# Altium PCB ComboCamera.PcbDoc (part 2 of 2)
Units mm, origin at the board's own origin, x right, y up, seen from the top; angles counter-clockwise.
Board outline 54.59 x 25.9 mm, 6 copper layers (L1, L2, Layer 1, Layer 2, L5, L6), stack 1.597 mm thick; 83 components, 54 nets, 269 pads, 161 vias.
Unrouted connection lines stored in the file: 227.
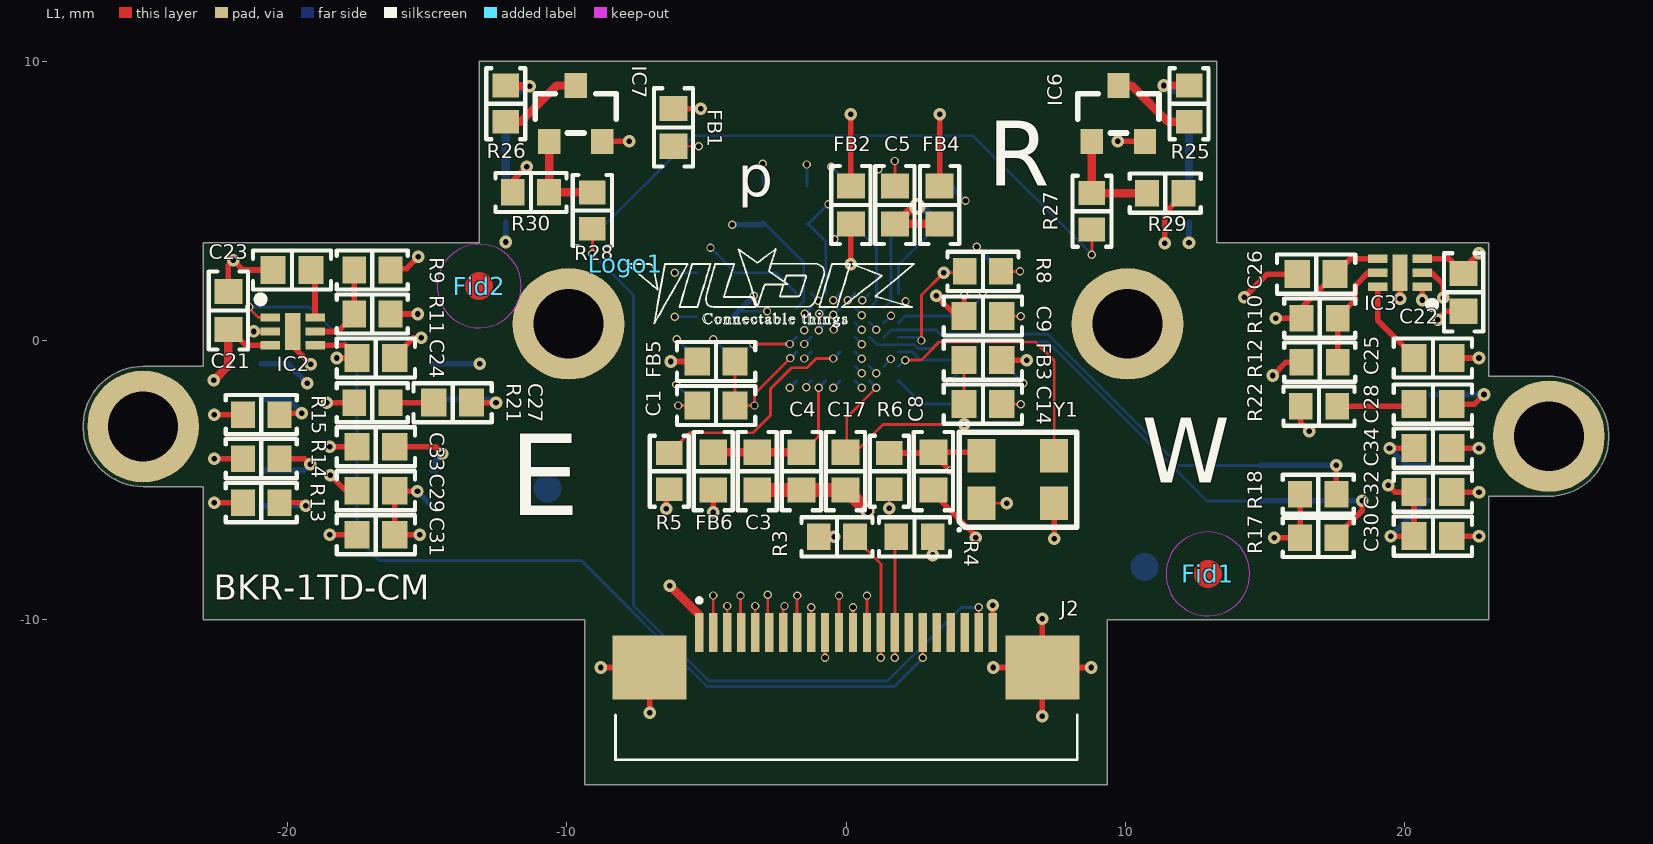
[diagram p0: L1 view]

## Via types
v1: diameter 0.3, hole 0.2, L1 to L6, tented both sides, 82 vias
v2: diameter 0.45, hole 0.2, L1 to L6, tented both sides, 77 vias
v3: diameter 0.5, hole 0.3, L1 to L6, tented both sides, 1 vias
v4: diameter 0.6, hole 0.3, L1 to L6, tented both sides, 1 vias

## Nets (pads, with @x,y where several pads share a name; then routed paths per layer and width w, separated by ;. In a path a pad name is that pad's centre, name@x,y a point inside that pad or via, vN(x,y) a via of type N, cw(c..) or ccw(c..) an arc to the next point about the centre after c; other vN are vias at no path point) (continued)
D2: (continued)
  Layer 1 w0.1: v1(-3.775,-9.125) -3.775,-9.5 -4.064,-9.789 -4.762,-9.789 -5.228,-9.323 -5.228,-3.036 -3.021,-0.829 -3.021,0.421 -1.728,1.714 -0.737,1.714 v1(-0.459,1.436)
  L6 w0.1: v1@-0.453,1.431 IC1.A5
D3: IC1.B5 J2.5 | length 17.7
  L1 w0.1: J2.5 v1(-3.25,-9.5)
  Layer 1 w0.1: v1(-3.25,-9.5) -3.25,-9.2 ccw(c-3.375,-9.2) -3.375,-9.075 -3.385,-9.075 cw(c-3.385,-8.925) -3.535,-8.925 cw(c-3.385,-8.925) -3.385,-8.775 ccw(c-3.385,-8.64) -3.25,-8.64 -3.25,-8.475 -3.25,-8.325 -2.986,-8.061 -2.986,-7.952 ccw(c-3.136,-7.952) -3.136,-7.802 -3.261,-7.802 cw(c-3.261,-7.652) -3.411,-7.652 cw(c-3.261,-7.652) -3.261,-7.502 -3.136,-7.502 ccw(c-3.136,-7.352) -2.986,-7.352 ccw(c-3.136,-7.352) -3.136,-7.202 -3.161,-7.202 cw(c-3.161,-7.052) -3.311,-7.052 cw(c-3.161,-7.052) -3.161,-6.902 -3.136,-6.902 ccw(c-3.136,-6.752) -2.986,-6.752 ccw(c-3.136,-6.752) -3.136,-6.602 -3.161,-6.602 cw(c-3.161,-6.452) -3.311,-6.452 cw(c-3.161,-6.452) -3.161,-6.302 -3.136,-6.302 ccw(c-3.136,-6.152) -2.986,-6.152 ccw(c-3.136,-6.152) -3.136,-6.002 -3.161,-6.002 cw(c-3.161,-5.852) -3.311,-5.852 cw(c-3.161,-5.852) -3.161,-5.702 -3.136,-5.702 ccw(c-3.136,-5.552) -2.986,-5.552 ccw(c-3.136,-5.552) -3.136,-5.402 -3.161,-5.402 cw(c-3.161,-5.252) -3.311,-5.252 cw(c-3.161,-5.252) -3.161,-5.102 -3.136,-5.102 ccw(c-3.136,-4.952) -2.986,-4.952 ccw(c-3.136,-4.952) -3.136,-4.802 -3.161,-4.802 cw(c-3.161,-4.652) -3.311,-4.652 cw(c-3.161,-4.652) -3.161,-4.502 -3.136,-4.502 ccw(c-3.136,-4.352) -2.986,-4.352 ccw(c-3.136,-4.352) -3.136,-4.202 -3.161,-4.202 cw(c-3.161,-4.052) -3.311,-4.052 cw(c-3.161,-4.052) -3.161,-3.902 -3.136,-3.902 ccw(c-3.136,-3.752) -2.986,-3.752 ccw(c-3.136,-3.752) -3.136,-3.602 -3.161,-3.602 cw(c-3.161,-3.452) -3.311,-3.452 cw(c-3.161,-3.452) -3.161,-3.302 -3.136,-3.302 ccw(c-3.136,-3.152) -2.986,-3.152 ccw(c-3.136,-3.152) -3.136,-3.002 -3.161,-3.002 cw(c-3.161,-2.852) -3.311,-2.852 cw(c-3.161,-2.852) -3.161,-2.702 -3.136,-2.702 ccw(c-3.136,-2.552) -2.986,-2.552 -2.986,-2.402 -2.986,-2.102 -2.986,-1.802 -2.986,-1.652 -2.455,-1.12 -2.455,0.186 -1.977,0.664 -1.354,0.664 -0.711,0.664 v1(-0.459,0.916)
  L6 w0.1: v1@-3.278,-9.472 v1(-3.25,-9.5) ; v1@-0.453,0.911 IC1.B5
D4: IC1.A4 J2.6 | length 20
  L1 w0.1: v1(-2.8,-9.1) -2.8,-10.4 J2.6
  Layer 1 w0.1: v1(-2.8,-9.1) -2.8,-8.632 -2.644,-8.475 -2.644,-8.325 -2.644,-8.169 cw(c-2.5,-8.169) -2.5,-8.025 ccw(c-2.5,-7.875) -2.35,-7.875 ccw(c-2.5,-7.875) -2.5,-7.725 -2.644,-7.725 -2.701,-7.725 cw(c-2.701,-7.575) -2.851,-7.575 cw(c-2.701,-7.575) -2.701,-7.425 -2.644,-7.425 ccw(c-2.644,-7.307) -2.525,-7.307 -2.525,-7.244 ccw(c-2.644,-7.244) -2.644,-7.125 -2.701,-7.125 cw(c-2.701,-6.975) -2.851,-6.975 cw(c-2.701,-6.975) -2.701,-6.825 -2.644,-6.825 ccw(c-2.644,-6.707) -2.525,-6.707 -2.525,-6.644 ccw(c-2.644,-6.644) -2.644,-6.525 -2.701,-6.525 cw(c-2.701,-6.375) -2.851,-6.375 cw(c-2.701,-6.375) -2.701,-6.225 -2.644,-6.225 ccw(c-2.644,-6.107) -2.525,-6.107 -2.525,-6.044 ccw(c-2.644,-6.044) -2.644,-5.925 -2.701,-5.925 cw(c-2.701,-5.775) -2.851,-5.775 cw(c-2.701,-5.775) -2.701,-5.625 -2.644,-5.625 -2.5,-5.625 ccw(c-2.5,-5.475) -2.35,-5.475 ccw(c-2.5,-5.475) -2.5,-5.325 -2.644,-5.325 -2.701,-5.325 cw(c-2.701,-5.175) -2.851,-5.175 cw(c-2.701,-5.175) -2.701,-5.025 -2.644,-5.025 -2.5,-5.025 ccw(c-2.5,-4.875) -2.35,-4.875 ccw(c-2.5,-4.875) -2.5,-4.725 -2.644,-4.725 -2.701,-4.725 cw(c-2.701,-4.575) -2.851,-4.575 cw(c-2.701,-4.575) -2.701,-4.425 -2.644,-4.425 -2.5,-4.425 ccw(c-2.5,-4.275) -2.35,-4.275 ccw(c-2.5,-4.275) -2.5,-4.125 -2.644,-4.125 -2.701,-4.125 cw(c-2.701,-3.975) -2.851,-3.975 cw(c-2.701,-3.975) -2.701,-3.825 -2.644,-3.825 -2.5,-3.825 ccw(c-2.5,-3.675) -2.35,-3.675 ccw(c-2.5,-3.675) -2.5,-3.525 -2.644,-3.525 -2.701,-3.525 cw(c-2.701,-3.375) -2.851,-3.375 cw(c-2.701,-3.375) -2.701,-3.225 -2.644,-3.225 -2.5,-3.225 ccw(c-2.5,-3.075) -2.35,-3.075 ccw(c-2.5,-3.075) -2.5,-2.925 -2.644,-2.925 -2.701,-2.925 cw(c-2.701,-2.775) -2.851,-2.775 cw(c-2.701,-2.775) -2.701,-2.625 -2.644,-2.625 -2.5,-2.625 ccw(c-2.5,-2.475) -2.35,-2.475 ccw(c-2.5,-2.475) -2.5,-2.325 cw(c-2.5,-2.182) -2.644,-2.182 -2.644,-2.025 -2.644,-1.9 -1.676,-0.933 -1.379,-0.933 -1.149,-0.703 -1.149,-0.282 -0.778,0.089 -0.339,0.089 -0.149,0.279 -0.149,1.222 0.061,1.431 v1(0.061,1.436)
  L6 w0.1: v1@0.067,1.431 IC1.A4 IC1.A4@0.305,1.68
D5: IC1.B4 J2.7 | length 18.3
  L1 w0.1: J2.7 -2.25,-9.55 v1(-2.2,-9.5)
  Layer 1 w0.1: v1(-2.2,-9.5) -2.2,-8.95 -1.55,-8.3 -1.55,-7.975 -1.55,-7.825 -1.55,-7.661 cw(c-1.414,-7.661) -1.414,-7.525 ccw(c-1.414,-7.375) -1.264,-7.375 ccw(c-1.414,-7.375) -1.414,-7.225 cw(c-1.414,-7.089) -1.55,-7.089 -1.55,-7.061 cw(c-1.414,-7.061) -1.414,-6.925 ccw(c-1.414,-6.775) -1.264,-6.775 ccw(c-1.414,-6.775) -1.414,-6.625 cw(c-1.414,-6.489) -1.55,-6.489 -1.55,-6.461 cw(c-1.414,-6.461) -1.414,-6.325 ccw(c-1.414,-6.175) -1.264,-6.175 ccw(c-1.414,-6.175) -1.414,-6.025 -1.55,-6.025 -1.696,-6.025 cw(c-1.696,-5.875) -1.846,-5.875 cw(c-1.696,-5.875) -1.696,-5.725 -1.55,-5.725 -1.414,-5.725 ccw(c-1.414,-5.575) -1.264,-5.575 ccw(c-1.414,-5.575) -1.414,-5.425 -1.55,-5.425 -1.686,-5.425 cw(c-1.686,-5.275) -1.836,-5.275 cw(c-1.686,-5.275) -1.686,-5.125 -1.55,-5.125 -1.414,-5.125 ccw(c-1.414,-4.975) -1.264,-4.975 ccw(c-1.414,-4.975) -1.414,-4.825 -1.55,-4.825 -1.686,-4.825 cw(c-1.686,-4.675) -1.836,-4.675 cw(c-1.686,-4.675) -1.686,-4.525 -1.55,-4.525 -1.414,-4.525 ccw(c-1.414,-4.375) -1.264,-4.375 ccw(c-1.414,-4.375) -1.414,-4.225 -1.55,-4.225 -1.686,-4.225 cw(c-1.686,-4.075) -1.836,-4.075 cw(c-1.686,-4.075) -1.686,-3.925 -1.55,-3.925 -1.414,-3.925 ccw(c-1.414,-3.775) -1.264,-3.775 ccw(c-1.414,-3.775) -1.414,-3.625 cw(c-1.414,-3.489) -1.55,-3.489 -1.55,-3.325 -1.55,-3.3 -1.444,-3.194 -1.338,-3.088 ccw(c-1.444,-2.982) -1.338,-2.876 -1.499,-2.715 cw(c-1.392,-2.609) -1.499,-2.503 cw(c-1.392,-2.609) -1.286,-2.503 -1.052,-2.738 ccw(c-1.02,-2.705) -0.988,-2.738 -0.15,-1.9 -0.15,-0.4 0.239,-0.011 0.239,0.583 v1(0.56,0.904)
  L6 w0.1: IC1.B4@0.316,1.159 v1@0.565,0.91
D6: IC1.A3 J2.8 | length 18.8
  L1 w0.1: J2.8 v1(-1.75,-9.126)
  Layer 1 w0.1: v1(-1.75,-9.126) -1.75,-9.85 -1.925,-10.025 -2.325,-10.025 -2.489,-9.861 -2.489,-8.64 -2.025,-8.176 -2.025,-8.026 -2.025,-7.862 cw(c-1.889,-7.862) -1.889,-7.726 ccw(c-1.889,-7.576) -1.739,-7.576 ccw(c-1.889,-7.576) -1.889,-7.426 -2.025,-7.426 -2.186,-7.426 cw(c-2.186,-7.276) -2.336,-7.276 cw(c-2.186,-7.276) -2.186,-7.126 -2.025,-7.126 -1.889,-7.126 ccw(c-1.889,-6.976) -1.739,-6.976 ccw(c-1.889,-6.976) -1.889,-6.826 -2.025,-6.826 -2.186,-6.826 cw(c-2.186,-6.676) -2.336,-6.676 cw(c-2.186,-6.676) -2.186,-6.526 -2.025,-6.526 -1.889,-6.526 ccw(c-1.889,-6.376) -1.739,-6.376 ccw(c-1.889,-6.376) -1.889,-6.226 -2.025,-6.226 -2.186,-6.226 cw(c-2.186,-6.076) -2.336,-6.076 cw(c-2.186,-6.076) -2.186,-5.926 -2.175,-5.926 ccw(c-2.175,-5.776) -2.025,-5.776 -2.025,-2.875 -1.73,-2.58 -1.73,-1.551 -0.961,-0.781 -0.961,-0.361 -0.7,-0.1 -0.26,-0.1 0.05,0.21 0.05,0.905 v1(0.581,1.436)
  L6 w0.1: v1@0.587,1.431 IC1.A3
D7: IC1.D4 J2.9 | length 18.2
  L1 w0.1: J2.9 v1(-1.25,-9.55)
  Layer 1 w0.1: v1(-1.25,-9.55) -1.075,-9.375 -1.075,-6.707 -1.075,-6.557 -1.075,-6.407 cw(c-0.925,-6.407) -0.925,-6.257 -0.425,-6.257 ccw(c-0.425,-6.107) -0.275,-6.107 ccw(c-0.425,-6.107) -0.425,-5.957 -0.925,-5.957 cw(c-0.925,-5.807) -1.075,-5.807 cw(c-0.925,-5.807) -0.925,-5.657 -0.425,-5.657 ccw(c-0.425,-5.507) -0.275,-5.507 ccw(c-0.425,-5.507) -0.425,-5.357 -0.925,-5.357 cw(c-0.925,-5.207) -1.075,-5.207 cw(c-0.925,-5.207) -0.925,-5.057 -0.425,-5.057 ccw(c-0.425,-4.907) -0.275,-4.907 ccw(c-0.425,-4.907) -0.425,-4.757 -0.925,-4.757 cw(c-0.925,-4.607) -1.075,-4.607 cw(c-0.925,-4.607) -0.925,-4.457 -0.425,-4.457 ccw(c-0.425,-4.307) -0.275,-4.307 ccw(c-0.425,-4.307) -0.425,-4.157 -0.925,-4.157 cw(c-0.925,-4.007) -1.075,-4.007 cw(c-0.925,-4.007) -0.925,-3.857 -0.425,-3.857 ccw(c-0.425,-3.707) -0.275,-3.707 ccw(c-0.425,-3.707) -0.425,-3.557 -0.993,-3.557 cw(c-0.993,-3.475) -1.075,-3.475 -1.075,-3.275 0.039,-2.161 0.039,-0.658 v1(0.562,-0.135)
  L6 w0.1: IC1.D4 0.318,0.12 v1@0.567,-0.129
DCMI_HSYNC: IC1.C7 J2.12 | length 17.7
  L1 w0.1: J2.12 v1(0.25,-9.55)
  Layer 2 w0.1: v1(-1.5,0.375) -1.929,0.375 -2.775,-0.471 -2.775,-3 -2.775,-3.125 ccw(c-2.625,-3.125) -2.625,-3.275 -2.45,-3.275 cw(c-2.45,-3.425) -2.3,-3.425 cw(c-2.45,-3.425) -2.45,-3.575 -2.625,-3.575 ccw(c-2.625,-3.725) -2.775,-3.725 ccw(c-2.625,-3.725) -2.625,-3.875 -2.45,-3.875 cw(c-2.45,-4.025) -2.3,-4.025 cw(c-2.45,-4.025) -2.45,-4.175 -2.625,-4.175 ccw(c-2.625,-4.325) -2.775,-4.325 ccw(c-2.625,-4.325) -2.625,-4.475 -2.45,-4.475 cw(c-2.45,-4.625) -2.3,-4.625 cw(c-2.45,-4.625) -2.45,-4.775 -2.625,-4.775 ccw(c-2.625,-4.925) -2.775,-4.925 ccw(c-2.625,-4.925) -2.625,-5.075 -2.45,-5.075 cw(c-2.45,-5.225) -2.3,-5.225 cw(c-2.45,-5.225) -2.45,-5.375 -2.625,-5.375 ccw(c-2.625,-5.525) -2.775,-5.525 ccw(c-2.625,-5.525) -2.625,-5.675 -2.45,-5.675 cw(c-2.45,-5.825) -2.3,-5.825 cw(c-2.45,-5.825) -2.45,-5.975 -2.625,-5.975 ccw(c-2.625,-6.125) -2.775,-6.125 ccw(c-2.625,-6.125) -2.625,-6.275 -2.45,-6.275 cw(c-2.45,-6.425) -2.3,-6.425 cw(c-2.45,-6.425) -2.45,-6.575 -2.625,-6.575 ccw(c-2.625,-6.725) -2.775,-6.725 -2.775,-6.875 -2.775,-7.025 -0.25,-9.55 v1(0.25,-9.55)
  L6 w0.1: v1@-1.493,0.391 IC1.C7
DCMI_IRQ: J2.16
DCMI_PIXCK: IC1.F2 J2.11 | length 15.5
  L1 w0.1: J2.11 v1(-0.25,-9.126)
  Layer 1 w0.1: v1(-0.25,-9.126) 0.125,-8.751 0.125,-8.601 0.125,-8.451 cw(c0.275,-8.451) 0.275,-8.301 0.65,-8.301 ccw(c0.65,-8.151) 0.8,-8.151 ccw(c0.65,-8.151) 0.65,-8.001 0.125,-8.001 -0.15,-8.001 cw(c-0.15,-7.851) -0.3,-7.851 cw(c-0.15,-7.851) -0.15,-7.701 0.125,-7.701 0.65,-7.701 ccw(c0.65,-7.551) 0.8,-7.551 ccw(c0.65,-7.551) 0.65,-7.401 0.125,-7.401 0.037,-7.401 cw(c0.037,-7.251) -0.113,-7.251 cw(c0.037,-7.251) 0.037,-7.101 0.125,-7.101 0.65,-7.101 ccw(c0.65,-6.951) 0.8,-6.951 ccw(c0.65,-6.951) 0.65,-6.801 0.275,-6.801 cw(c0.275,-6.651) 0.125,-6.651 0.125,-6.6 0.125,-3.514 1.369,-2.27 1.369,-0.899 v1(1.608,-0.66)
  L6 w0.1: IC1.F2 1.356,-0.912 v1(1.608,-0.66)
DCMI_PWREN: IC2.1 J2.17 | length 35.8
  L1 w0.1: v1(-21.35,1.2) -21.35,1.15 -21.025,0.825 IC2.1 ; v1(2.75,-11.35) J2.17
  L6 w0.1: v1(-21.35,1.2) -19.2,1.2 -17.5,-0.5 -17.5,-7.075 -16.7,-7.875 -9.475,-7.875 -4.975,-12.375 1.725,-12.375 v1(2.75,-11.35)
DCMI_SCL: IC1.D2 IC4.3 IC5.3 J2.14 R3.1 R14.1 R18.1 | length 70.2
  L1 w0.1: R3.1 0.325,-7.075 1.25,-8 J2.14 v1(1.25,-11.35)
  L1 w0.2: R14.1 -19.375,-4.225 v2(-19.175,-4.425) ; R18.1 v2(17.55,-4.47)
  Layer 2 w0.1: v2(-19.175,-4.425) -19.175,-4.9 -15.5,-8.575 -9.508,-8.575 -6.283,-11.8 0.8,-11.8 v1(1.25,-11.35) 7.6,-5 17.02,-5 v2(17.55,-4.47)
  L6 w0.1: IC1.D2 1.608,0.372 3.228,0.372 3.364,0.236 7.206,0.236 11.912,-4.47 IC5.3
  L6 w0.2: IC4.3 -20.915,-4.65 -19.4,-4.65 v2(-19.175,-4.425) ; IC5.3 v2(17.55,-4.47)
DCMI_SDA: IC1.D3 IC4.2 IC5.2 J2.15 R4.1 R13.1 R17.1 | length 72.3
  L1 w0.1: v1(1.75,-11.35) J2.15 1.75,-7.075 R4.1
  L1 w0.2: R13.1 -19.503,-5.8 -19.393,-5.91 v2(-19.325,-5.91) ; R17.1 17.55,-7 18.475,-6.075 v2(18.475,-5.74)
  Layer 2 w0.1: v2(-19.325,-5.91) -18.432,-5.91 -15.578,-8.764 -9.586,-8.764 -6.361,-11.989 1.111,-11.989 v1(1.75,-11.35) 7.9,-5.2 17.935,-5.2 v2(18.475,-5.74)
  L6 w0.1: IC1.D3 1.104,-0.148 2.44,-0.148 2.58,-0.289 3.058,-0.289 3.297,-0.05 7.225,-0.05 12.915,-5.74 IC5.2
  L6 w0.2: IC4.2 v2(-19.325,-5.91) ; IC5.2 v2(18.475,-5.74)
DCMI_VSYNC: IC1.C6 J2.13 | length 16.3
  L1 w0.1: J2.13 v1(0.75,-9.126)
  Layer 2 w0.1: v1(-0.975,0.375) -1.264,0.664 -1.38,0.664 -1.907,0.664 -2.964,-0.393 -2.964,-7.103 -0.228,-9.839 0.37,-9.839 0.75,-9.459 v1(0.75,-9.126)
  L6 w0.1: v1(-0.975,0.375) IC1.C6
EXCLK: IC1.F1 Y1.3 | length 9.6
  L1 w0.1: v1(2.125,-0.7) 2.695,-0.7 3.334,-0.061 6.786,-0.061 7.45,-0.725 Y1.3 Y1.3@7.475,-4.15
  L6 w0.1: IC1.F1 v1@2.111,-0.686
GND: C8.1 C21.1 C22.1 C23.1 C24.1 C25.1 C26.1 C29.2 C30.2 C31.1 C32.1 C33.2 C34.2 FB1.2 HOLDER1.GND IC2.2 IC2.7 IC3.2 IC3.7 IC4.6 IC5.5 IC5.6 IC6.2 IC7.2 J2.10 J2.22 J2.MP1 J2.MP2 pad. R11.2 R12.2 R21.1 R22.1 R29.2 R30.2 Y1.2 | length 46.9
  L1 w0.1: v1(-0.75,-11.35) J2.10
  L1 w0.2: C21.1 -22.1,2.7 v2(-21.925,2.875) -21.575,2.525 C23.1 ; v2(-21.2,0.325) IC2.2 ; IC2.7 -19.8,-0.2 v2(-19.15,-0.85) ; v2(-18.575,-2.225) R21.1 ; v2(-18.475,-6.95) C31.1 ; v2(-18.475,-3.8) C33.2 ; v2(-18.45,-4.825) -17.95,-5.325 -17.5,-5.325 C29.2 ; R11.2 v2(-15.325,0.95) ; C24.1 -16.15,-0.575 -15.475,0.1 v2(-15.2,0.1) ; R30.2 -11.925,5.725 v2(-11.425,6.225) ; v2(-8.775,-11.7) J2.MP1 v2(-7.025,-13.325) ; IC7.2 v2(-7.75,7.125) ; FB1.2 v2(-5.2,8.3) ; C8.1 3.125,-5.467 4.65,-6.992 v2(4.65,-7.061) ; J2.22 v2(5.25,-9.475) ; v2(5.275,-11.7) J2.MP2 ; v2(7.025,-13.45) J2.MP2 ; v2(7.025,-9.95) J2.MP2 ; v2(7.45,-7.1) Y1.2 ; v2(8.775,-11.7) J2.MP2 ; v2(9.725,7.125) IC6.2 ; v2(11.4,3.475) 11.4,4.55 12.075,5.225 R29.2 ; v2(14.25,1.55) 15.075,2.375 C26.1 ; v2(15.275,-1.25) 15.75,-0.775 R12.2 ; R22.1 16.275,-2.95 v2(16.575,-3.25) ; v2(19.825,1.5) IC3.7 ; IC3.2 20.95,2.425 21.375,2 v2(21.375,1.525) ; v2(21.175,0.75) 21.475,1.05 C22.1 ; C30.2 v2(22.65,-7) ; C32.1 v2(22.65,-5.425) ; C34.2 v2(22.65,-3.85) ; C25.1 v2(22.65,-0.625)
  L6 w0.2: IC4.6 -19.975,-0.83 -19.28,-1.525 v2(-19.275,-1.525)
NetC23_2: C23.2 IC2.6 | length 1.8
  L1 w0.2: C23.2 -19,2.375 IC2.6
NetC25_2: C25.2 IC3.6 | length 3.1
  L1 w0.2: IC3.6 19.025,0.725 20.325,-0.575 C25.2
NetC27_1: C27.1 R21.2 | length 1.5
  L1 w0.2: R21.2 C27.1
NetC27_2: C27.2 IC4.10 | length 3.2
  L1 w0.2: C27.2 v2(-12.525,-2.225)
  L6 w0.2: IC4.10 -12.65,-2.1 v2(-12.525,-2.225)
NetC28_1: C28.1 R22.2 | length 2.8
  L1 w0.2: R22.2 20.25,-2.35 C28.1
NetC28_2: C28.2 IC5.10 | length 3.2
  L1 w0.2: C28.2 22.485,-2.275 v2(22.83,-1.93)
  L6 w0.2: IC5.10 v2(22.83,-1.93)
NetC33_1: C33.1 IC4.12 | length 2.6
  L1 w0.2: C33.1 -14.7,-3.8 v2(-14.45,-4.05)
  L6 w0.2: IC4.12 -14.7,-4.64 -14.7,-4.3 v2(-14.45,-4.05)
NetC34_1: C34.1 IC5.12 | length 2.6
  L1 w0.2: v2(19.45,-3.85) C34.1
  L6 w0.2: v2(19.45,-3.85) 20.07,-4.47 IC5.12
NetD1_2: D1.2 D3.1 | length 1.7
  L6 w0.3: D1.2 D3.1
NetD2_2: D2.2 D4.1 | length 1.7
  L6 w0.3: D2.2 D4.1
NetD3_2: D3.2 R25.2 | length 1.9
  L1 w0.3: v2(11.375,9.125) R25.2
  L6 w0.3: v2(11.375,9.125) 11.525,8.975 D3.2
NetD4_2: D4.2 R26.2 | length 1.8
  L1 w0.3: R26.2 -12.15,9.1 v2(-11.325,9.1)
  L6 w0.3: D4.2 -11.45,8.975 v2(-11.325,9.1)
NetIC1_E5: IC1.E5 R5.2 | length 8.2
  L1 w0.1: R5.2 -5.6,-3.3 -3.325,-3.3 -2.7,-2.675 -2.7,-1.725 -1.95,-0.975 -1.397,-0.975 -1.066,-0.644 v1(-0.459,-0.644)
  L6 w0.1: v1@-0.453,-0.649 IC1.E5
NetIC2_5: IC2.5 R9.1 R11.1 | length 3.3
  L1 w0.2: IC2.5 -18.175,0.325 -17.6,0.9 R11.1 R9.1
NetIC3_5: IC3.5 R10.1 R12.1 | length 4
  L1 w0.2: R12.1 R10.1 17.6,0.85 18.225,1.475 18.225,1.975 18.675,2.425 IC3.5
NetIC4_1: IC4.1 IC4.7 IC4.8 IC4.11 IC4.14
NetIC4_5: IC4.5 R15.1 | length 2.5
  L1 w0.2: R15.1 -20.225,-2.6 v2(-19.475,-2.6)
  L6 w0.2: IC4.5 -19.975,-2.1 v2(-19.475,-2.6)
NetIC5_1: IC5.1 IC5.7 IC5.8 IC5.11 IC5.14
NetIC6_1: IC6.1 R27.2 R29.1 | length 3.8
  L1 w0.3: IC6.1 R27.2 R29.1
NetIC6_3: IC6.3 R25.1 | length 3.1
  L1 w0.3: IC6.3 10.225,9.125 11.525,7.825 R25.1
NetIC7_1: IC7.1 R28.2 R30.1 | length 3.4
  L1 w0.3: IC7.1 R30.1 R28.2
NetIC7_3: IC7.3 R26.1 | length 3
  L1 w0.3: R26.1 -11.65,7.825 -10.35,9.125 IC7.3
NetR6_2: R6.2 Y1.1 | length 6.3
  L1 w0.1: v2(1.55,-6) R6.2 R6.2@1.6,-5.325 ; Y1.1@4.575,-6.1 Y1.1 v2(5.75,-5.825)
  Layer 1 w0.1: v2(1.55,-6) 5.48,-6 5.655,-5.825 v2(5.75,-5.825)
SPI_MISO: J2.19
SPI_MOSI: J2.20
SPI_SCL: J2.18
VDD: C14.2 C15.2 C16.2 C17.2 C18.2 C19.2 C20.2 FB3.1 IC1.A6 IC1.A8 IC1.C1 IC1.D8 IC1.G1 IC1.G3 | length 52.1
  L1 w0.1: v1(-3.31,-0.127) -3.309,-0.125 -2.02,-0.125 v1(-2.019,-0.124) ; C17.2 C17.2@0.025,-3.95 ; v1(1.08,-1.695) 0.025,-2.75 C17.2@0.025,-3.95 ; FB3.1 C14.2 v2(4.225,-3) 1.325,-3 0.375,-3.95 C17.2@0.025,-3.95
  L2 w0.1: v1(-4.75,0.05) -4.75,0.104 -4.85,0.204 v1(-4.85,3.325) -4.85,4.508 -3.991,5.366 -0.134,5.366 ; v1(-0.625,4.875) -0.134,5.366 ; v2(4.225,-3) 4.9,-2.325 v1(4.9,1.725) 4.9,3.166 4.964,3.23 4.964,4.905 4.502,5.366 -0.134,5.366
  L6 w0.1: v1(-4.85,3.325) -4,2.475 C19.2 -2.509,2.425 IC1.A8 ; v1(-4.75,0.05) C18.2 -3.875,-0.675 -3.327,-0.127 v1(-3.31,-0.127) ; v1@-2.013,-0.129 IC1.D8 IC1.D8@-1.764,0.102 ; C20.2 C20.2@-1.35,4.175 ; IC1.A6 -0.724,3.549 C20.2@-1.35,4.175 ; v1(-0.625,4.875) -0.65,4.875 C20.2@-1.35,4.175 ; IC1.G3@0.831,-1.446 IC1.G3 v1@1.085,-1.689 ; IC1.G1 2.711,-2.275 C16.2 v2(4.225,-3) ; IC1.C1 2.111,0.875 C15.2 4.225,0.925 4.9,1.6 v1(4.9,1.725)
VIO: C8.2 C9.2 C10.2 C11.2 C12.2 C13.2 FB2.1 IC1.B3 IC1.B8 IC1.C5 IC1.E1 R3.2 R4.2 R5.1 R6.1 R7.1 Y1.4 | length 34.9
  L1 w0.2: v2(-6.425,-6.025) -6.425,-5.425 R5.1 ; R3.2 v2(-0.425,-7.025) ; v2(0.175,2.725) FB2.1 ; R6.1 C8.2@3.1,-4.025 ; v2(3.1,-7.675) R4.2 ; v2(3.225,1.6) 3.95,0.875 C9.2 v1(4.225,1.625) ; v1(3.725,-4.65) C8.2@3.1,-4.025 ; Y1.4 4.725,-4 C8.2 C8.2@3.1,-4.025
  L2 w0.1: v1(-2.825,1.05) -2.825,-0.6 -2.425,-1 -1.325,-1 -0.44,-0.115 v1(-0.44,0.396)
  L2 w0.2: v2(0.175,2.725) 2.1,2.725 v2(3.225,1.6)
  L6 w0.1: C13.2 -3.8,1.05 v1(-2.825,1.05) ; C12.2 -2.925,4.2 -1.512,2.787 -1.512,1.412 IC1.B8 ; v1@-0.434,0.391 -0.185,0.64 IC1.C5 IC1.C5@-0.204,0.618 ; C11.2@0.125,4.175 C11.2 0.225,4.175 1.088,3.312 1.088,1.412 IC1.B3 ; IC1.E1 2.364,-0.4 2.664,-0.7 C10.2 4.225,-0.95 v1(3.725,-1.45)
  L6 w0.2: v1(-4.075,4.15) -3.025,4.15 C12.2 ; C13.2 -4,0.9 v1(-3.3,1.6) ; v1(-0.425,3.625) C11.2@0.125,4.175 ; v1(4.675,3.35) R7.1
VPHY: C1.2 C2.2 FB5.1 IC1.E8 | length 5.6
  L1 w0.1: FB5.1 C1.2 v1(-3.275,-2.325) -3.275,-1.911 v1(-1.991,-0.627)
  L6 w0.1: C2.2@-3.975,-2.275 C2.2 v1(-3.275,-2.325) ; v1(-1.991,-0.627) IC1.E8
VPLL: C3.2 C4.2 FB6.1 IC1.G6 | length 6.1
  L1 w0.1: C4.2 -1.55,-4 -0.979,-3.429 v1(-0.979,-1.684)
  L1 w0.3: FB6.1 C3.2 C4.2
  L6 w0.1: v1@-0.973,-1.689 IC1.G6
pads on no net: IC1.A2 IC1.D5 IC1.D6 IC1.E2 IC1.E3 IC1.E6 IC1.F5 IC1.F6 IC1.F7 IC1.F8 IC1.G2 IC4.4 IC5.4

## Polygon pours and split planes (outlines as drawn)
3v on L2 "L3-3V" (solid, shelved, pour order 55): -23,-10 -23,-5.225 -25.15,-5.225 cw(c-25.15,-3.075) -25.15,-0.925 -23,-0.925 -23,3.5 -13.125,3.5 -13.125,10 13.275,10 13.275,3.5 23,3.5 23,-1.275 25.15,-1.275 cw(c25.15,-3.425) 25.15,-5.575 23,-5.575 23,-10 9.35,-10 9.35,-15.9 -9.35,-15.9 -9.35,-10
VIO on L2 "L2-VIO" (solid, shelved, pour order 51): 4.95,-4.9 4.95,-7.925 -1.9,-7.925 -1.9,-6.375 -6.95,-6.375 -6.95,-5.575 3.55,-5.575 3.55,3.15 -3.125,3.15 -3.125,0.075 -4.7,0.075 -4.7,5.125 4.95,5.125
GND on L5 "L5-GND" (solid, shelved, pour order 56): -23,-10 -23,-5.225 -25.15,-5.225 cw(c-25.15,-3.075) -25.15,-0.925 -23,-0.925 -23,3.5 -13.125,3.5 -13.125,10 13.275,10 13.275,3.5 23,3.5 23,-1.275 25.15,-1.275 cw(c25.15,-3.425) 25.15,-5.575 23,-5.575 23,-10 9.35,-10 9.35,-15.9 -9.35,-15.9 -9.35,-10
CAM_GND on L5 "L3-CAM_GND" (solid, shelved, pour order 48): -6.925,7.6 -6.925,-6.375 7.075,-6.375 7.075,7.6

## Keep-outs
L1:
  region: -6.925,7.575

## Silkscreen, mask and mechanical layers (free items; w line width, h text height)
Top Overlay:
  text "R" at 5.075,4.775 h4
  text "p" at -3.875,4.675 h2.5
  text "W" at 10.575,-5.85 h4
  text "E" at -12.05,-7.225 h5
  text "BKR-1TD-CM" at -22.625,-9.575 h1.52
Bottom Overlay:
  text "BKR-1TD-CM" at 4.65,-15.225 h1.8
Mechanical 1:
  lines w0.1: -23,-10 -23,-5.225 -25.15,-5.225 cw(c-25.15,-3.075) -25.15,-0.925 -23,-0.925 -23,3.5 -13.125,3.5 -13.125,10 13.275,10 13.275,3.5 23,3.5 23,-1.275 25.15,-1.275 cw(c25.15,-3.425) 25.15,-5.575 23,-5.575 23,-10 9.35,-10 9.35,-15.9 -9.35,-15.9 -9.35,-10 -22.975,-10

## Text inside footprints (layer, text, board x,y; h text height)
HOLDER1: Bottom Overlay "M12 HOLDER" at 3.475,-7.8 h0.9